# Altium PCB Glucometer-I.C.- Tests Full V1.PcbDoc
Units mm, origin at the board's own origin, x right, y up, seen from the top; angles counter-clockwise.
Board outline 42.25 x 42.25 mm, 2 copper layers (Top Layer, Bottom Layer); 34 components, 34 nets, 139 pads, 17 vias.
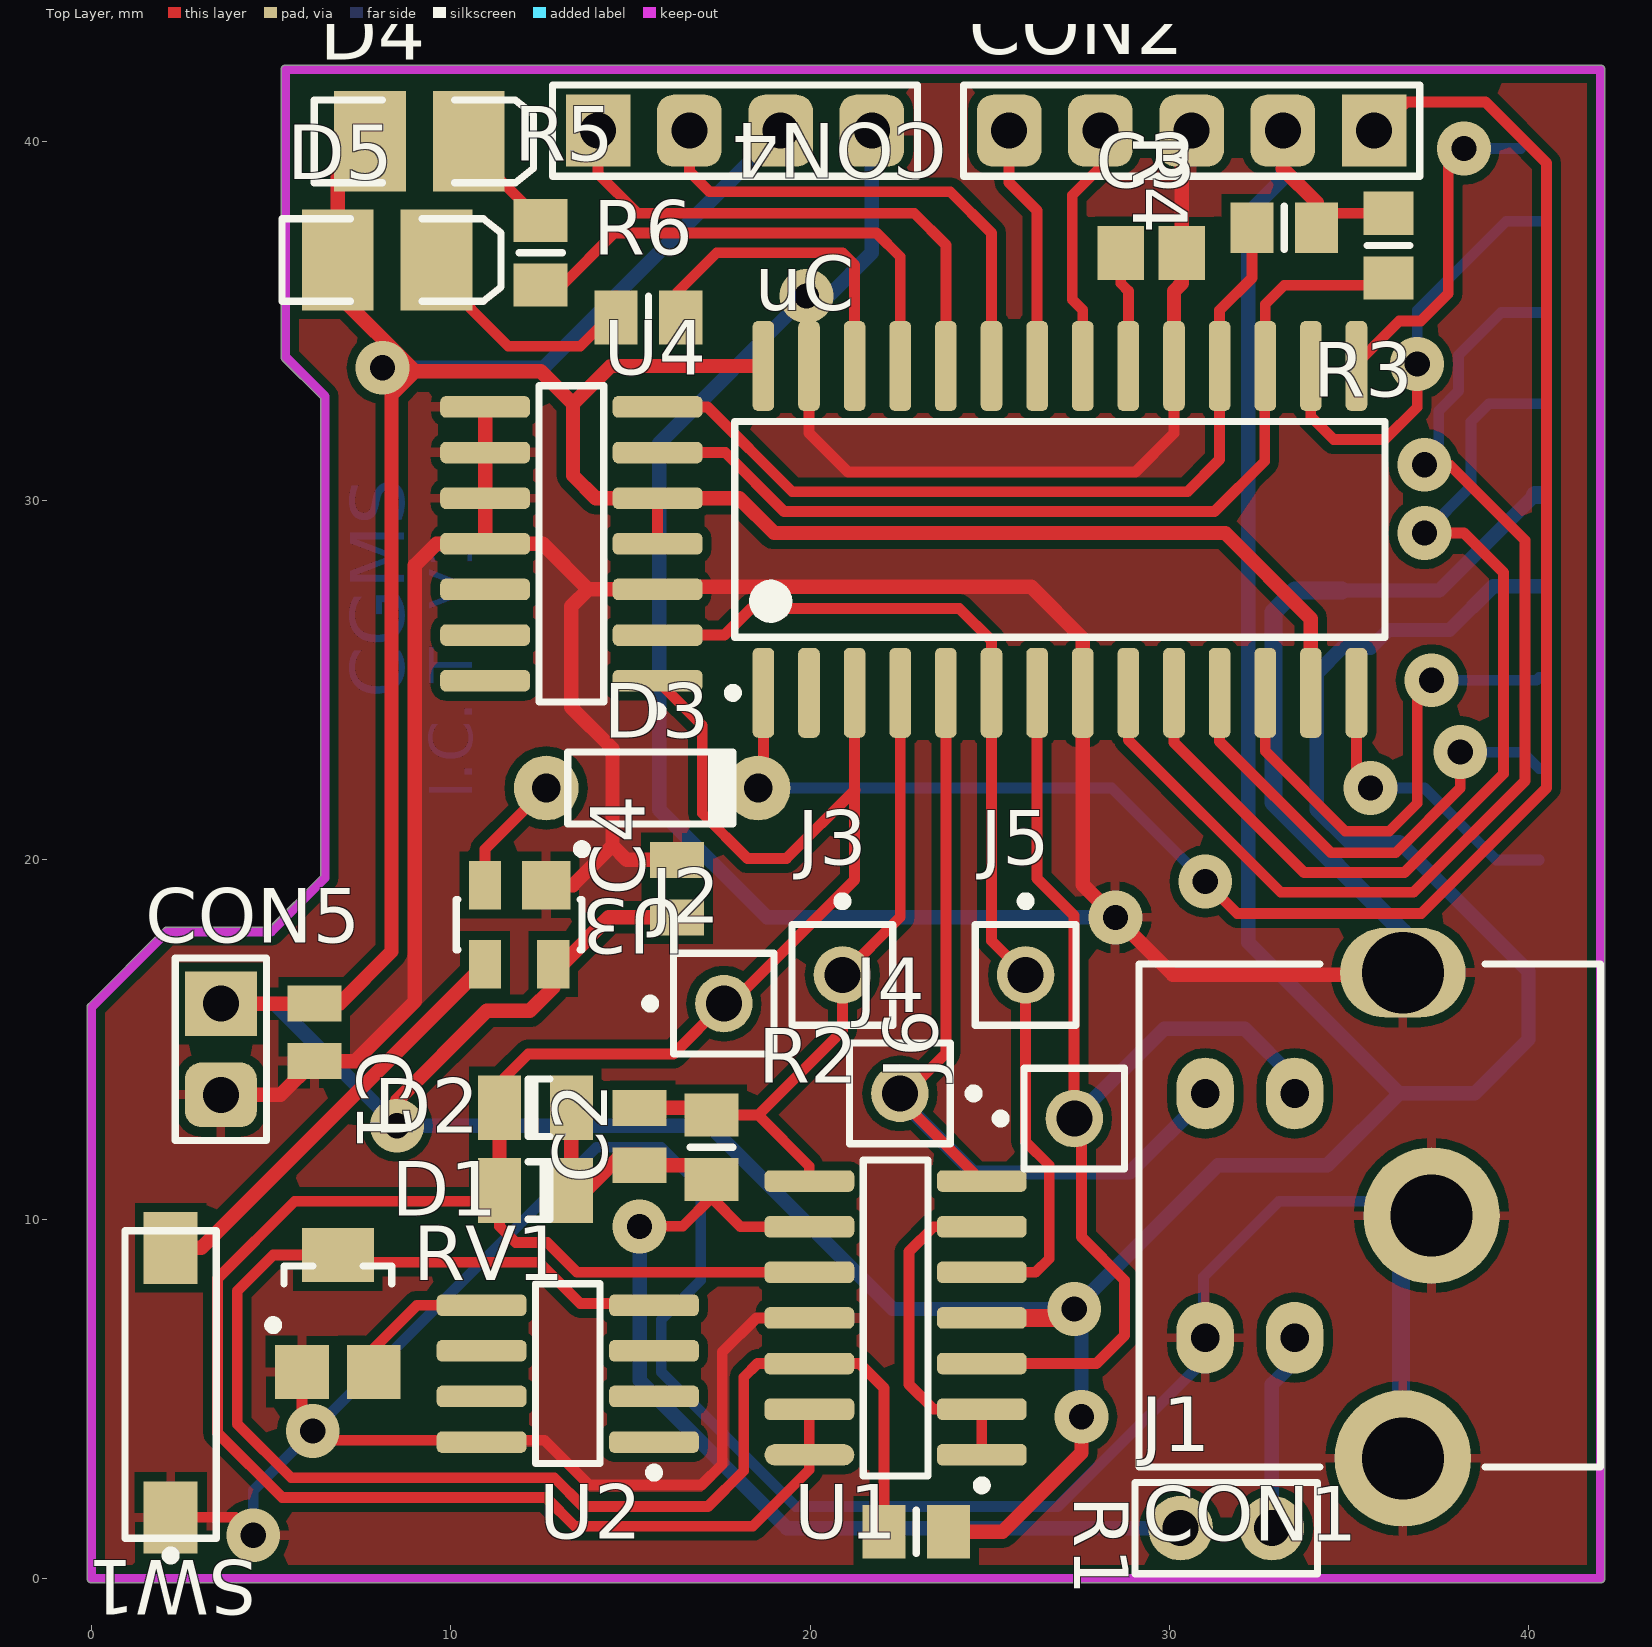
[diagram p0: Top Layer view]
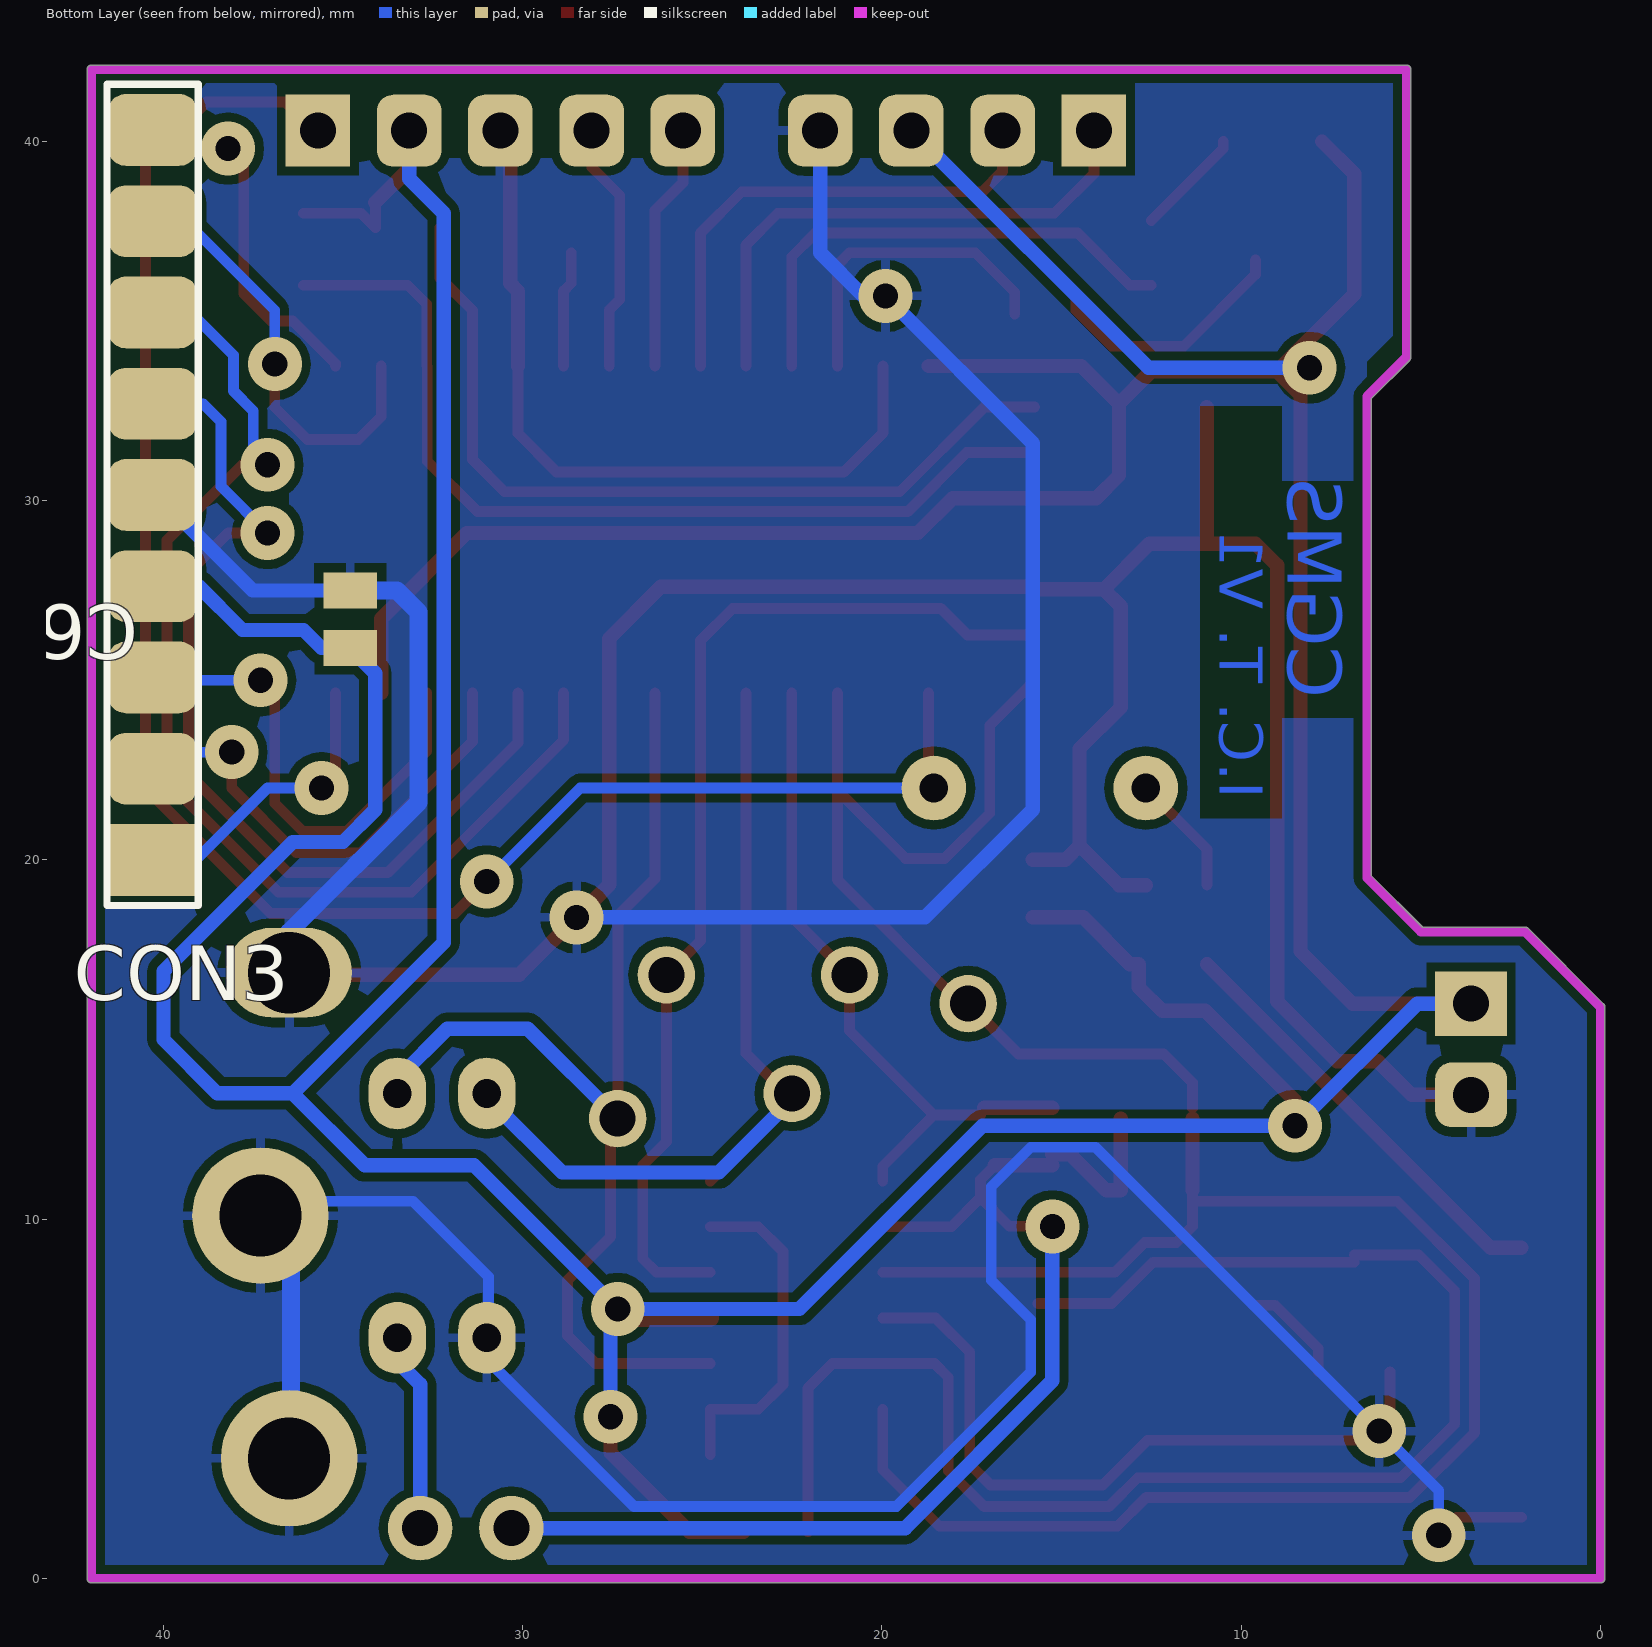
[diagram p1: Bottom Layer view, seen from below]

## Layer stack, top to bottom
Top Layer: signal copper 0.0356
Dielectric: dielectric 0.32, FR-4, Dk 4.8
Bottom Layer: signal copper 0.0356

## Board outline
-0.127,0 -0.127,15.9 cw(c0,15.9) -0.09,15.991 -0.09,15.99 2.01,18.09 2.009,18.09 cw(c2.1,18) 2.1,18.127 4.947,18.127 6.373,19.553 6.373,32.847 5.31,33.91 cw(c5.4,34) 5.273,34 5.273,42 cw(c5.4,42) 5.4,42.127 42,42.127 cw(c42,42) 42.127,42 42.127,0 cw(c42,0) 42,-0.127 0,-0.127 cw(c0,0)

## Design rules (kind name [scope] priority, off if disabled: settings)
AssemblyTestPointUsage AssemblyTestPointUsage_1 [All] p2:
AssemblyTestpoint AssemblyTestpoint_1 [All] p2: testpointundercomponent=TRUE minsize=1.016 maxsize=2.54 preferedsize=1.524 minholesize=0 maxholesize=1.016 preferedholesize=0.813 testpointgrid=0.025 usegrid=TRUE gridtolerance=0 allowsidetop=TRUE allowsidebottom=TRUE
Clearance [All] p1: gap=0.25
ComponentClearance ComponentClearance_1 [All] p2: gap=0.254 collisioncheckmode=3 verticalgap=0.254 showdistances=FALSE
DiffPairsRouting DiffPairsRouting_1 [All] p2: maxlimit=0.254 minlimit=0.254 mostfreqgap=0.254 maxuncoupledlength=12.7
FabricationTestPointUsage TestPointUsage [All] p2: valid=0 allowmultiple=FALSE
FabricationTestpoint Testpoint [All] p2: side=3 testpointundercomponent=TRUE minsize=1.016 maxsize=2.54 preferedsize=1.524 minholesize=0 maxholesize=1.016 preferedholesize=0.813 testpointgrid=0.025 allowsidetop=TRUE allowsidebottom=TRUE usegrid=TRUE gridtolerance=0
FanoutControl Fanout_LCC [IsLCC] p1: bgadir=Out bgaviamode=Centered fanoutstyle=Auto fanoutdirection=Alternating viagrid=0.025 // Fanout_LCC (Default Rule)
FanoutControl Fanout_BGA [IsBGA] p2: bgadir=Out bgaviamode=Centered fanoutstyle=Auto fanoutdirection=Alternating viagrid=0.025 // Fanout_BGA (Default Rule)
FanoutControl Fanout_Default [All] p4: bgadir=Out bgaviamode=Centered fanoutstyle=Auto fanoutdirection=Alternating viagrid=0.025 // Fanout_Default (Default Rule)
FanoutControl Fanout_Small [(CompPinCount < 5)] p5: bgadir=Out bgaviamode=Centered fanoutstyle=Auto fanoutdirection=OutThenIn viagrid=0.025 // Fanout_Small (Default Rule)
FanoutControl Fanout_BGA_1 [IsBGA] p6: bgadir=Out bgaviamode=Centered fanoutstyle=Auto fanoutdirection=Alternating viagrid=0.025 // Fanout_BGA (Default Rule)
FanoutControl Fanout_LCC_1 [IsLCC] p7: bgadir=Out bgaviamode=Centered fanoutstyle=Auto fanoutdirection=Alternating viagrid=0.025 // Fanout_LCC (Default Rule)
FanoutControl Fanout_SOIC_1 [IsSOIC] p8: bgadir=Out bgaviamode=Centered fanoutstyle=Auto fanoutdirection=Alternating viagrid=0.025 // Fanout_SOIC (Default Rule)
FanoutControl Fanout_Small_1 [(CompPinCount < 5)] p9: bgadir=Out bgaviamode=Centered fanoutstyle=Auto fanoutdirection=OutThenIn viagrid=0.025 // Fanout_Small (Default Rule)
FanoutControl Fanout_Default_1 [All] p10: bgadir=Out bgaviamode=Centered fanoutstyle=Auto fanoutdirection=Alternating viagrid=0.025 // Fanout_Default (Default Rule)
Height Height_1 [All] p2: minheight=0 maxheight=25.4 prefheight=12.7
HoleSize [All] p1: absolutevalues=TRUE maxlimit=5 minlimit=0.025 maxpercent=80.000 minpercent=20.000
HoleSize HoleSize_1 [All] p2: absolutevalues=TRUE maxlimit=5 minlimit=0.025 maxpercent=80.000 minpercent=20.000
HoleToHoleClearance HoleToHoleClearance_1 [All] p2: gap=0.254 allowstackedmicrovias=TRUE
LayerPairs LayerPairs_1 [All] p2: enforce=TRUE
MinimumSolderMaskSliver MinimumSolderMaskSliver_1 [All] p2: minsoldermaskwidth=0.254
NetAntennae NetAntennae_1 [All] p2: netantennaetolerance=0
PasteMaskExpansion PasteMaskExpansion_1 [All] p2: expansion=0
PlaneClearance PlaneClearance_1 [All] p2: clearance=0.508
PolygonConnect [All] p1: connectstyle=Relief reliefconductorwidth=0.254 reliefentries=4 polygonreliefangle="90 Angle" airgapwidth=0.254
PolygonConnect PolygonConnect_1 [All] p2: connectstyle=Relief reliefconductorwidth=0.254 reliefentries=4 polygonreliefangle="90 Angle" airgapwidth=0.254
RoutingPriority RoutingPriority_1 [All] p2: routingpriority=0
RoutingTopology RoutingTopology_1 [All] p2: topology=Shortest
RoutingVias [All] p1: holewidth=0.8 width=1.5 viastyle="Through Hole" minholewidth=0.7 minwidth=1 maxholewidth=1 maxwidth=2
ShortCircuit ShortCircuit_1 [All] p2: allowed=FALSE
SilkToSilkClearance SilkToSilkClearance_1 [All] p2: silktosilkclearance=0.254
SilkToSolderMaskClearance SilkscreenOverComponentPads [IsPad] p2: minsilkscreentomaskgap=0.254 clearancetoexposedcopper=TRUE
SolderMaskExpansion [All] p1: expansion=0.102
SolderMaskExpansion SolderMaskExpansion_1 [All] p2: expansion=0.102
UnRoutedNet UnRoutedNet_1 [All] p2:
Width [All] p1: maxlimit=5 minlimit=0.25 preferedwidth=0.3 minimp=50.000000 maximp=50.000000 favimp=50.000000
23 further rules are at their usual default settings.

## Components (designator, comment, footprint, x,y, rotation, side; value= is the part's Value field where it differs from the comment)
C1 "Cap2" CAPC1608N 6.2,15.2 r270 top
C2 "Cap2" CAPC1608N 15.255,12.3 r90 top
C3 "Cap" CAPC2012N 29.5,36.9 r180 top
C4 "Cap" CAPC1608N 16.3,19.2 r270 top
C6 "Cap" CAPC1608N 34.8,26.7 r270 bottom
CON1 "" CDIN2.6-3H4A 42,10.1 r180 top
CON2 "Header 5" HDR1X5 35.7,40.3 r180 top
CON3 "Header 9" HDR1X9 40.3,20 r90 bottom
CON4 "Header 4" HDR1X4 14.1,40.3 r0 top
CON5 "Header 2" HDR1X2#1 3.6,16 r270 top
D1 "1N4148" CD3216-1206#1 12.455,10.8 r0 top
D2 "1N4148" CD3216-1206#2 12.455,13.1 r180 top
D3 "1N4148" DO-35 15.555,22 r0 top
D4 "LED2" 3.2X1.6X1.1 9.1,40 r0 top
D5 "LED2" 3.2X1.6X1.1 8.2,36.7 r0 top
J1 "Header 2" HDR1X2#2 32.855,1.4 r180 top
J2 "Socket" PIN1 17.6,16 r90 top
J3 "Socket" PIN1 20.9,16.8 r0 top
J4 "Socket" PIN1 22.5,13.5 r270 top
J5 "Socket" PIN1 26,16.8 r0 top
J6 "Socket" PIN1 27.355,12.8 r90 top
R1 "Res1" RESC2012N#1 22.955,1.3 r0 top
R2 "Res1" RESC2012N#1 17.255,12 r270 top
R3 "Res1" RESC2012N#2 36.1,37.1 r270 top
R4 "Res1" RESC2012N#2 33.2,37.6 r180 top
R5 "Res1" RESC2012N#1 12.5,36.9 r90 top
R6 "Res1" RESC2012N#1 15.5,35.1 r180 top
RV1 "RPot" SOT23-3N 6.855,8 r90 top
SW1 "SW-PB" SPST-2 2.2,5.4 r90 top
U1 "LMC6044IN" M14A_N 22.38,7.25 r180 top
U2 "LM385BM" M08A_N 13.255,5.7 r180 top
U3 "SMT811TW16F" SOT143 11.9,18.2 r180 top
U4 "AD5241" R-14_N 13.355,28.8 r180 top
uC "PIC24FJ64GA102-I/SO" SOIC-SO28_N 26.955,29.2 r90 top

## Footprints (in the part's own frame and the unit in brackets; to place one, negate y for a bottom-side part, rotate by r counter-clockwise, add the part's x,y. Pads: shape width x height; smd on the part's side, far side on the other; paste and mask are expansions set on the pad)
3.2X1.6X1.1 [mm] "SMT LED; 2 Flat Leads"
  rect 2x2.8 smd: 1(-1.35,0) 2(1.4,0)
  silkscreen extent -2.9,-1.15 3.2,1.15
CAPC1608N [mm] "Chip Capacitor, Body 1.6x0.8mm, IPC Medium Density"
  rect 1x1.5 smd: 1(-0.8,0) 2(0.8,0)
  body extent -0.87,-0.48 0.87,0.48, height 0.85
CAPC2012N [mm] "Chip Capacitor, Body 2.0x1.3mm, IPC Medium Density"
  rect 1.3x1.5 smd: 1(-0.85,0) 2(0.85,0)
  body extent -1.1,-0.72 1.1,0.72, height 1.1
CD3216-1206#1 [mm] "Chip Diode; Body 3.2 x 1.6 mm (LxW typ)"
  rect 1.2x1.8 smd: 1(-1.1,0) 2(0.9,0)
  silkscreen extent -0.3,-0.8 0.3,0.8
CD3216-1206#2 [mm] "Chip Diode; Body 3.2 x 1.6 mm (LxW typ)"
  rect 1.2x1.8 smd: 1(-0.9,0) 2(1.1,0)
  silkscreen extent -0.3,-0.8 0.3,0.8
CDIN2.6-3H4A [mm] "Connector; Circular DIN, Thru-Hole; 4 Position; Right Angle; Pitch 2.1/2.6 mm; Body 14 x 12.84 x 13 mm (WxTxH), Shielded, Special PCB Retention"
  oval 1.6x2 hole 0.8: 1(8.51,-3.4) 2(8.51,3.4) 3(11,-3.4) 4(11,3.4)
  oval 3.5x2.5 hole 2.28: MH1(5.5,-6.76)
  round 3.8 hole 2.28: MH2(4.7,0) MH3(5.5,6.76)
  silkscreen extent 0,-7 12.84,7, body extent 0,-7 12.84,7, height 13
DO-35 [mm] "Diode, Axial; Body 4.6 x 2 mm (LxDia. max), Lead Dia. 0.53 mm (max)"
  round 1.8 hole 0.8: 1(-2.9,0) 2(3,0)
  silkscreen extent -2.3,-1 2.4,1
HDR1X2#1 [mm] "Connector; Header; 2 Position"
  rect 1.8x2 hole 1: 1(0,0)
  rrect50% 1.8x2 hole 1: 2(2.54,0)
  silkscreen extent -1.27,-1.27 3.81,1.27
HDR1X2#2 [mm] "Connector; Header; 2 Position"
  round 1.8 hole 1: 1(0,0) 2(2.54,0)
  silkscreen extent -1.27,-1.27 3.81,1.27
HDR1X4 [mm] "Connector; Header; 4 Position"
  rect 1.8x2 hole 1: 1(0,0)
  rrect50% 1.8x2 hole 1: 2(2.54,0) 3(5.08,0) 4(7.62,0)
  silkscreen extent -1.27,-1.27 8.89,1.27
HDR1X5 [mm] "Connector; Header; 5 Position"
  rect 1.8x2 hole 1: 1(0,0)
  rrect50% 1.8x2 hole 1: 2(2.54,0) 3(5.08,0) 4(7.62,0) 5(10.16,0)
  silkscreen extent -1.27,-1.27 11.43,1.27
HDR1X9 [mm] "Connector; Header; 9 Position"
  rect 2x2.5 smd: 1(0,0)
  rrect50% 2x2.5 smd: 2(2.54,0) 3(5.08,0) 4(7.62,0) 5(10.16,0) 6(12.7,0) 7(15.24,0) 8(17.78,0) 9(20.32,0)
  silkscreen extent -1.27,-1.27 21.59,1.27
M08A_N [mm] "SOIC, 8-Leads, Body 4.9x3.9mm, Pitch 1.27mm, IPC Medium Density"
  rrect50% 2.5x0.6 smd: 1(-2.4,1.905) 2(-2.4,0.635) 3(-2.4,-0.635) 4(-2.4,-1.905) 5(2.4,-1.905) 6(2.4,-0.635) 7(2.4,0.635) 8(2.4,1.905)
  silkscreen extent -2.53,-2.5 0.9,2.88, body extent -2,-2.5 2,2.5, height 1.75
M14A_N [mm] "SOIC, 14-Leads, Body 8.6x3.9mm, Pitch 1.27mm, IPC Medium Density"
  rrect50% 2.5x0.6 smd: 1(-2.4,3.81) 2(-2.4,2.54) 3(-2.4,1.27) 4(-2.4,0) 5(-2.4,-1.27) 6(-2.4,-2.54) 7(-2.4,-3.81) 8(2.4,-3.81) 9(2.4,-2.54) 10(2.4,-1.27) 11(2.4,0) 12(2.4,1.27) 13(2.4,2.54)
  oval 2.5x0.6 smd: 14(2.4,3.81)
  silkscreen extent -2.53,-4.4 0.9,4.78, body extent -2,-4.38 2,4.38, height 1.75
PIN1 [mm] "Connector; Plug"
  round 1.6 hole 1: 1(0,0)
  silkscreen extent -1.4,-1.4 1.4,2.17
R-14_N [mm] "14-Pin Narrow Body Small Outline Integrated Circuit 1.27 mm Pitch, IPC Medium Density"
  rrect50% 2.5x0.6 smd: 1(-2.4,3.81) 2(-2.4,2.54) 3(-2.4,1.27) 4(-2.4,0) 5(-2.4,-1.27) 6(-2.4,-2.54) 7(-2.4,-3.81) 8(2.4,-3.81) 9(2.4,-2.54) 10(2.4,-1.27) 11(2.4,0) 12(2.4,1.27) 13(2.4,2.54) 14(2.4,3.81)
  silkscreen extent -2.53,-4.4 0.9,4.78, body extent -1.95,-4.33 1.95,4.33, height 1.75
RESC2012N#1 [mm] "Chip Resistor, Body 2.0x1.3mm, IPC Medium Density"
  rect 1.2x1.5 smd: 1(-0.9,0) 2(0.9,0)
  silkscreen extent 0,-0.6 0,0.6, body extent -1.07,-0.7 1.07,0.7, height 0.65
RESC2012N#2 [mm] "Chip Resistor, Body 2.0x1.3mm, IPC Medium Density"
  rect 1.2x1.4 smd: 1(-0.9,0) 2(0.9,0)
  silkscreen extent 0,-0.6 0,0.6, body extent -1.07,-0.7 1.07,0.7, height 0.65
SOIC-SO28_N [mm] "SOIC, 28-Leads, Body 17.9x7.5mm, Pitch 1.27mm, IPC Medium Density"
  rrect50% 2.5x0.6 smd: 1(-4.55,8.255) 2(-4.55,6.985) 3(-4.55,5.715) 4(-4.55,4.445) 5(-4.55,3.175) 6(-4.55,1.905) 7(-4.55,0.635) 8(-4.55,-0.635) 9(-4.55,-1.905) 10(-4.55,-3.175) 11(-4.55,-4.445) 12(-4.55,-5.715) 13(-4.55,-6.985) 14(-4.55,-8.255) 15(4.55,-8.255) 16(4.55,-6.985) 17(4.55,-5.715) 18(4.55,-4.445) 19(4.55,-3.175) 20(4.55,-1.905) 21(4.55,-0.635) 22(4.55,0.635) 23(4.55,1.905) 24(4.55,3.175) 25(4.55,4.445) 26(4.55,5.715) 27(4.55,6.985) 28(4.55,8.255)
  silkscreen extent -4.67,-9.05 3,9.23, body extent -3.8,-9.06 3.8,9.06, height 2.65
SOT23-3N [mm] "SOT23, 3-Leads, Body 2.9x1.3mm, Pitch 0.95mm, Lead Span 2.5mm, IPC Medium Density"
  rect 1.5x1.5 smd: 1(-2.25,1) 2(-2.25,-1)
  rect 1.5x2 smd: 3(1,0)
  silkscreen extent -1.07,-1.5 0.7,1.92, body extent -0.7,-1.5 0.7,1.5, height 1.1
SOT143 [mm] "SOT-143; 4 Leads; Body 3 x 2.6 mm, inc. leads (LxW max)"
  rect 1.35x1.35 smd: 1(-0.75,-1.1)
  rect 0.9x1.35 smd: 2(0.95,-1.1) 3(0.95,1.1) 4(-0.95,1.1)
  silkscreen extent -1.88,-2.22 1.75,0.7
SPST-2 [mm] "Switch; 2 Leads"
  rect 2x1.5 smd: 1(-3.7,0) 2(3.8,0)
  silkscreen extent -4.89,-1.27 4.28,1.27

## Part data
C1 C2 C3 C4 C6: "Capacitor"
CON1: library part "MiniDin 4Pins - SuperVideo", "MiniDin 4 Pins"
CON2: "Header, 5-Pin"
CON3: "Header, 9-Pin"
CON4: "Header, 4-Pin"
CON5 J1: "Header, 2-Pin"
D1 D2 D3: "High Conductance Fast Diode"
D4 D5: "Typical RED, GREEN, YELLOW, AMBER GaAs LED"
R1 R2 R3 R4 R5 R6: "Resistor"
RV1: "Potentiometer"
SW1: "Switch"
U1: "CMOS Quad Micropower Operational Amplifier, 14-pin MDIP"
U2: "Adjustable Micropower Voltage Reference, 8-pin Narrow SOIC"
U3: "Reset Circuit, 3.08V, Push Pull Inverted RST"
U4: "AD5241BR"
uC: "General purpose 16-bit Flash Microcontroller with nanoWatt XLP, 64KB Flash, 8KB SRAM, 28-Pin SOIC, Industrial Temperature"

## Via types
v1: diameter 1.5, hole 0.7, Top Layer to Bottom Layer, 17 vias

## Nets (pads, with @x,y where several pads share a name; then routed paths per layer and width w, separated by ;. In a path a pad name is that pad's centre, name@x,y a point inside that pad or via, vN(x,y) a via of type N, cw(c..) or ccw(c..) an arc to the next point about the centre after c; other vN are vias at no path point)
3.3V: C1.1 C4.2 C6.2 CON2.2 CON3.4 CON4.3 CON5.1 D4.1 D5.1 R1.2 R3.1 R4.1 U1.4 U3.4 U4.4 U4.5 uC.13 uC.28 | length 201.5
  Top Layer w0.3: U4.4 U4.5 ; 33.16,39.24 CON2.2 ; 34.1,38.3 R4.1 34.5,38 R3.1
  Top Layer w0.4: CON5.1@3.1,16 6.9,16 8.35,17.45 8.35,32.95 9,33.6 ; D4.1 6.85,39.1 D5.1 6.85,35.75 9,33.6 ; v1(8.5,12.6) 8.5,13.3 11,15.8 12.2,15.8 12.85,16.45 U3.4 13.1,17.1 14.4,18.4 C4.2@15.8,18.4 ; uC.28 14.45,33.75 13.4,32.7 ; R1.2 25.355,1.3 27.555,3.5 v1(27.555,4.5) ; 33.16,39.24 34.1,38.3 ; uC.13 33.94,26.715 31.555,29.1 19,29.1 18.03,30.07 U4.5 14.03,30.07 13.4,30.7 13.4,32.7 ; 9,33.6 12.5,33.6 13.4,32.7
  Top Layer w0.5: U1.4 27.105,7.25 v1(27.355,7.5)
  Bottom Layer w0.4: CON5.1 5.1,16 v1(8.5,12.6) 17.2,12.6 22.3,7.5 v1(27.355,7.5) 31.355,11.5 34.4,11.5 36.4,13.5 ; v1(8.1,33.7) 12.58,33.7 CON4.3 ; v1(27.555,4.5) v1@27.555,7.3 ; CON2.2 33.16,38.96 32.2,38 32.2,17.7 36.4,13.5 ; CON3.4 39.02,27.62 37.8,26.4 36.1,26.4 35.6,25.9 C6.2 34.1,25.2 34.1,21.4 35,20.5 36.4,20.5 40,16.9 40,15 38.5,13.5 36.4,13.5
  Bottom Layer w0.5: v1(27.355,7.5) v1@27.555,7.3
CNT: CON1.3 J4.1 U1.7 uC.5 | length 25.9
  Top Layer w0.3: uC.5 23.78,14.62 22.5,13.34 U1.7
  Bottom Layer w0.4: J4.1@22.42,13.42 24.54,11.3 28.9,11.3 30.955,13.355 CON1.3@30.955,13.9
CSCON: CON3.7 uC.9 | length 31.9
  Top Layer w0.3: uC.9 28.86,23.34 33.1,19.1 36.8,19.1 39.9,22.2 39.9,28.9 37.8,31 v1(37.1,31)
  Bottom Layer w0.3: v1(37.1,31) 37.5,31.4 37.5,32.5 38.05,33.05 38.05,34.05 39.24,35.24 CON3.7
CSDATA: CON3.3 uC.12 | length 13.1
  Top Layer w0.3: uC.12 32.67,23.03 34.9,20.8 36.122,20.8 36.9,21.578 v1@36.9,24.57
  Bottom Layer w0.3: v1(37.3,25) 40.22,25 CON3.3
GND: C1.2 C3.1 C4.1 C6.1 CON1.4 CON1.MH1 CON1.MH2 CON1.MH3 CON2.3 CON3.5 CON4.4 CON5.2 RV1.1 SW1.1 U1.11 U2.8 U3.1 U4.3 U4.8 U4.9 U4.10 U4.11 uC.8 uC.19 uC.27 | length 231.4
  Top Layer w0.3: SW1.1 4,1.7 v1(4.5,1.2) ; v1@5.855,4.5 RV1.1 ; v1@6.205,4.15 6.51,3.845 12.61,3.845 13.855,2.6 16.98,2.6 17.555,3.175 17.555,6.3 18.505,7.25 U1.11 ; uC.27 19.97,31.885 21.055,30.8 29.055,30.8 30.13,31.875 uC.19 ; CON2.3@30.35,40.03 CON2.3
  Top Layer w0.4: CON5.2 5.26,13.46 C1.2 7.331,14.4 9,16.069 9,28.2 9.6,28.8 U4.11 ; U4.8@10.955,32.6 U4.9 U4.10 U4.11 ; U3.1 13.4,19.3 14.5,20.4 ; C4.1@15.8,20 14.9,20 14.5,20.4 ; uC.19 30.13,35.83 30.35,36.05 C3.1 CON2.3@30.35,40.03 ; CON1.MH1@35.995,16.8 30.1,16.8 v1(28.5,18.4) 27.59,19.31 uC.8 27.59,26.165 26.155,27.6 15.825,27.6 U4.3 13.825,27.53 ; CON1.MH1@36.278,17.082 CON1.MH1@36.455,17.26 ; U4.11 12.555,28.8 13.825,27.53 ; 13.825,27.53 13.355,27.06 13.355,24.245 14.5,23.1 14.5,20.4
  Bottom Layer w0.3: v1(4.5,1.2) 4.5,2.445 v1(6.155,4.1) 14.055,12 15.855,12 16.955,10.9 16.955,8.3 15.855,7.2 15.855,5.749 19.604,2 26.9,2 30.955,6.055 30.955,8.4 33.055,10.5 CON1.MH2@37.255,10.5
  Bottom Layer w0.4: CON4.4 21.72,36.9 20.52,35.7 v1(19.9,35.7) 15.8,31.6 15.8,21.4 18.8,18.4 v1(28.5,18.4) ; C6.1 37.516,27.5 CON3.5@40.176,30.16
  Bottom Layer w0.5: C6.1 33.5,27.5 32.9,26.9 32.9,21.6 36.5,18 CON1.MH1 ; CON1.MH3@36.295,2.5 36.455,2.34 CON1.MH3@36.455,3.74 ; CON1.MH3@37.255,4.54 CON1.MH3@36.455,3.74 ; CON1.MH2@37.255,10.5 36.455,9.7 CON1.MH3@36.455,3.74 ; CON3.5@40.176,30.16 CON3.5
IRQ1: CON3.1 uC.14 | length 8.3
  Top Layer w0.3: uC.14 35.21,22.39 v1(35.6,22)
  Bottom Layer w0.3: v1(35.6,22) 37.1,22 39.1,20 CON3.1
LED1: R5.1 uC.25 | length 13.9
  Top Layer w0.3: R5.1 13.1,36 14.55,37.45 21.85,37.45 22.51,36.79 uC.25
LED2: R6.1 uC.26 | length 8.9
  Top Layer w0.3: R6.1@16.3,35.2 16.3,35.8 17.4,36.9 20.9,36.9 21.24,36.56 uC.26
MCLR: CON2.1 D3.2 uC.1 | length 50.8
  Top Layer w0.3: D3.2 18.7,22.145 uC.1 ; v1(31,19.4) 31.89,18.51 37.01,18.51 40.5,22 40.5,39.4 38.8,41.1 36.6,41.1 CON2.1@35.7,40.2
  Bottom Layer w0.3: D3.2 28.4,22 v1(31,19.4)
NetC3_2: C3.2 uC.20 | length 3.2
  Top Layer w0.3: C3.2 28.65,36.05 28.86,35.84 uC.20
NetD3_1: D3.1 U3.2 | length 3.4
  Top Layer w0.3: U3.2 10.95,20.295 D3.1
NetD4_2: D4.2 R5.2 | length 3
  Top Layer w0.3: D4.2 10.5,39.8 R5.2
NetD5_2: D5.2 R6.2 | length 7
  Top Layer w0.3: D5.2 9.6,36.3 11.6,34.3 13.6,34.3 14.6,35.3 R6.2@14.6,35.7
NetR1_1: R1.1 RV1.3 U1.12 U2.4 | length 42.6
  Top Layer w0.3: RV1.3@6.855,8.8 12.455,8.8 13.6,7.655 U2.4@15.655,7.655 ; RV1.3 5.055,9 4.055,8 4.055,4.3 5.555,2.8 12.877,2.8 13.677,2 17.158,2 18.155,2.997 18.155,5.6 18.535,5.98 U1.12 21.375,5.98 22.055,5.3 22.055,3 R1.1
NetRV1_3: RV1.2 U2.5 | length 3
  Top Layer w0.3: RV1.2 7.855,6.4 9.06,7.605 U2.5@9.66,7.605
NetSW1_2: SW1.2 U3.3 | length 12
  Top Layer w0.4: SW1.2 3.05,9.2 U3.3
NetU1_1: U1.1 U1.2 U1.6 | length 9.6
  Top Layer w0.3: U1.1 U1.2 23.445,4.71 22.755,5.4 22.755,9.1 23.445,9.79 U1.6
NetuC_2: uC.2
PEGC2: CON2.5 uC.22 | length 6.9
  Top Layer w0.3: CON2.5 25.54,38.86 26.32,38.08 uC.22
PEGD2: CON2.4 uC.21 | length 7
  Top Layer w0.3: uC.21 27.59,35.31 27.3,35.6 27.3,38.5 28.08,39.28 CON2.4
REF: CON1.1 J6.1 U1.3 uC.7 | length 31.3
  Top Layer w0.3: U1.3 27.975,5.98 28.755,6.76 28.755,8.3 27.555,9.5 27.555,12.6 J6.1 27.35,12.805 27.35,18.45 26.32,19.48 uC.7
  Bottom Layer w0.4: J6.1 29.855,15.3 32.1,15.3 33.445,13.955 CON1.1@33.445,13.5
RESET: CON3.6 uC.10 | length 27.2
  Top Layer w0.3: uC.10 30.13,23.27 33.75,19.65 36.55,19.65 39.3,22.4 39.3,28 38.2,29.1 v1(37.1,29.1)
  Bottom Layer w0.3: v1(37.1,29.1) 38.4,30.4 38.4,32.2 38.9,32.7 CON3.6
SCK: CON3.9 uC.15 | length 9.2
  Top Layer w0.3: uC.15 35.21,33.81 36.4,35 37,35 37.766,35.766 37.766,39.366 v1(38.2,39.8)
  Bottom Layer w0.3: v1(38.2,39.8) CON3.9@39.78,39.8
SCL1: R3.2 U4.6 uC.17 | length 26.2
  Top Layer w0.3: U4.6 17.637,31.34 19.277,29.7 31.255,29.7 32.655,31.1 uC.17@32.655,33.735 ; uC.17 32.67,35.47 33.2,36 R3.2@36.1,36
SDA1: R4.2 U4.7 uC.18 | length 23.8
  Top Layer w0.3: U4.7 17.145,32.61 19.505,30.25 30.505,30.25 31.4,31.145 uC.18 31.4,35.3 32.3,36.2 R4.2
SDI: CON3.8 uC.16 | length 12.1
  Top Layer w0.3: uC.16 33.94,32.34 34.58,31.7 36,31.7 36.9,32.6 v1(36.9,33.8)
  Bottom Layer w0.3: v1(36.9,33.8) 36.9,35.3 39.38,37.78 CON3.8
SDO: CON3.2 uC.11 | length 13.5
  Top Layer w0.3: uC.11 31.4,23.3 34.5,20.2 36.3,20.2 38.1,22 v1(38.1,23)
  Bottom Layer w0.3: v1(38.1,23) 39.84,23 CON3.2
U1RX: CON4.2 uC.23 | length 14
  Top Layer w0.3: CON4.2 16.64,39.16 17.2,38.6 23.9,38.6 25.05,37.45 uC.23
U1TX: CON4.1 uC.24 | length 15.1
  Top Layer w0.3: CON4.1 14.1,39.1 15.2,38 22.9,38 23.78,37.12 uC.24
VCTRL: J5.1 U1.5 U4.2 uC.6 | length 29.9
  Top Layer w0.3: U4.2 17.615,26.26 18.355,27 24.155,27 25.05,26.105 uC.6 25.05,17.75 J5.1 26,12.155 26.655,11.5 26.655,8.9 26.275,8.52 U1.5
VGND: D1.1 D2.2 J2.1 U1.10 U1.13 U1.14 U4.1 uC.3 | length 73.3
  Top Layer w0.3: D1.1 D1.1@11.355,10.5 ; D2.2 11.355,13.8 12.155,14.6 16.2,14.6 J2.1 ; U4.1 17,23.745 17,21.3 18.26,20.04 19.34,20.04 21.25,21.95 ; J2.1@17.245,16.045 17.845,16.045 21.24,19.44 uC.3 ; U1.13 U1.14 19.98,3.025 18.405,1.45 13.449,1.45 12.649,2.25 5.305,2.25 3.505,4.05 3.505,8.35 5.655,10.5 D1.1@11.355,10.5 ; U1.10 13.513,8.52 12.683,9.35 11.805,9.35 11.355,9.8 D1.1@11.355,10.5
  Top Layer w0.4: D1.1 D2.2@11.355,12.8
VOUT: C2.2 J3.1 R2.1 U1.8 uC.4 | length 19
  Top Layer w0.3: R2.1 18.555,12.9 ; U1.8 19.98,11.475 18.555,12.9 ; uC.4 22.51,18.41 J3.1 20.9,15.245 18.555,12.9
  Top Layer w0.4: C2.2 R2.1@17.155,13.1
WRK: CON1.2 J1.1 | length 5.9
  Bottom Layer w0.4: J1.1 32.855,5.4 33.445,5.99 CON1.2@33.445,7.1
WRK-IN: C2.1 D1.2 D2.1 J1.2 R2.2 U1.9 | length 33.4
  Top Layer w0.3: v1(15.255,9.8) 16.455,9.8 R2.2@17.255,10.6 ; R2.2@16.855,11.5 R2.2 R2.2@17.255,10.6 ; U1.9 18.065,9.79 R2.2@17.255,10.6
  Top Layer w0.4: D2.1@13.355,12.8 D1.2 13.755,10.8 14.755,11.8 C2.1@15.255,11.8 ; C2.1 R2.2@16.855,11.5
  Bottom Layer w0.4: v1(15.255,9.8) 15.255,5.5 19.355,1.4 J1.2
pads on no net: U2.1 U2.2 U2.3 U2.6 U2.7 U4.12 U4.13 U4.14

## Polygon pours and split planes (outlines as drawn)
GND on Bottom Layer "Bottom Layer-No Net" (solid, pour order 2): 5.4,42 42,42 42,0 0,0 0,15.9 2.1,18 5,18 6.5,19.5 6.5,33.87 5.4,34.97 5.4,42
GND on Top Layer "Bottom Layer-No Net" (solid, pour order 4): 0,0 0,15.9 2.1,18 5,18 6.5,19.5 6.5,32.9 5.4,34 5.4,42 42,42 42,0

## Keep-outs
Keep-Out Layer:
  lines w0.254: 0,0 0,15.9 2.1,18 5,18 6.5,19.5 6.5,32.9 5.4,34 5.4,42 42,42 42,0 0,0

## Other copper
Bottom Layer:
  text "CGMS" at 8.7,24.5 h1.5 r90
  text "I.C. T. V1" at 10.6,21.7 h1.2 r90

## Silkscreen, mask and mechanical layers (free items; w line width, h text height)
Mechanical 16:
  lines w0.127: -132.02,-31.275 -126.94,-31.275 ; -132.02,22.7 -126.94,22.7 ; -132.02,76.675 -126.94,76.675 ; -62.17,-85.25 -62.17,-80.17 ; -62.17,125.57 -62.17,130.65 ; 7.68,-85.25 7.68,-80.17 ; 7.68,125.57 7.68,130.65 ; 77.53,-85.25 77.53,-80.17 ; 77.53,125.57 77.53,130.65 ; 142.3,-31.275 147.38,-31.275 ; 142.3,22.7 147.38,22.7 ; 142.3,76.675 147.38,76.675 ; -132.02,-85.25 -132.02,130.65 147.38,130.65 147.38,-85.25 -132.02,-85.25 ; -126.94,-80.17 142.3,-80.17 142.3,125.57 -126.94,125.57 -126.94,-80.17
  text "1" at -97.696,127.221 h1.78
  text "2" at -27.829,127.221 h1.78
  text "3" at 41.894,127.221 h1.78
  text "4" at 111.769,127.221 h1.78
  text "A" at -130.115,101.364 h1.78
  text "A" at 144.205,101.364 h1.78
  text "B" at 144.58,50.05 h1.78
  text "B" at -130.115,47.389 h1.78
  text "C" at -130.115,-6.586 h1.78
  text "C" at 144.205,-6.586 h1.78
  text "D" at -130.115,-60.434 h1.78
  text "D" at 144.205,-60.434 h1.78
  text "1" at -97.696,-83.599 h1.78
  text "2" at -27.829,-83.599 h1.78
  text "3" at 41.894,-83.599 h1.78
  text "4" at 111.769,-83.599 h1.78

## Dimensions
0,42 to 42,42 on Top Overlay

## Text inside footprints (layer, text, board x,y; h text height)
CON1: Mechanical 1 "PCB Edge" at 41.4,16.8 h0.25 r270